# Altium PCB CW308T_ATMegaRF.PcbDoc
Units mil, origin at the board's own origin, x right, y up, seen from the top; angles counter-clockwise.
Board outline 2070 x 2695 mil, 4 copper layers (Component Side, Ground Plane, Power Plane, Solder Side), stack 33.234 mil thick; 31 components, 49 nets, 221 pads, 77 vias.
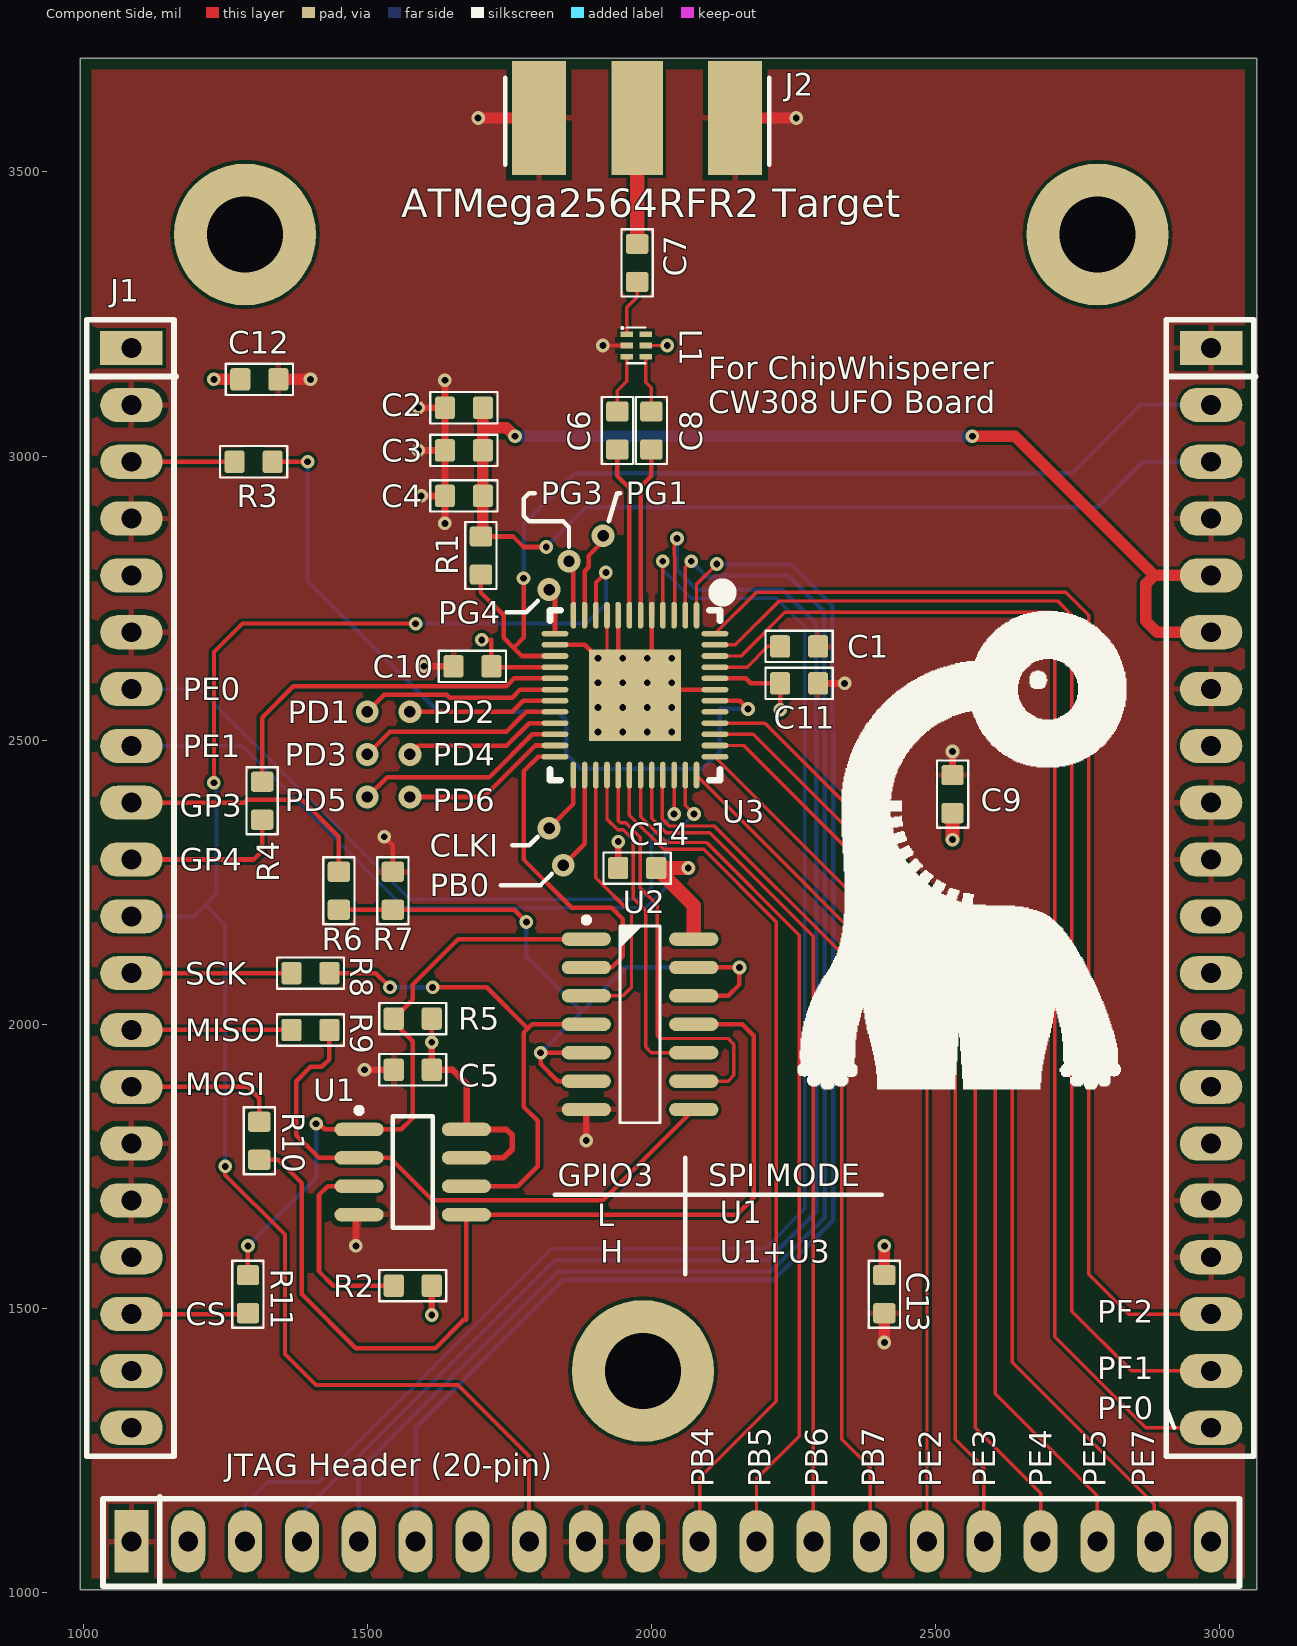
[diagram p0: Component Side view]
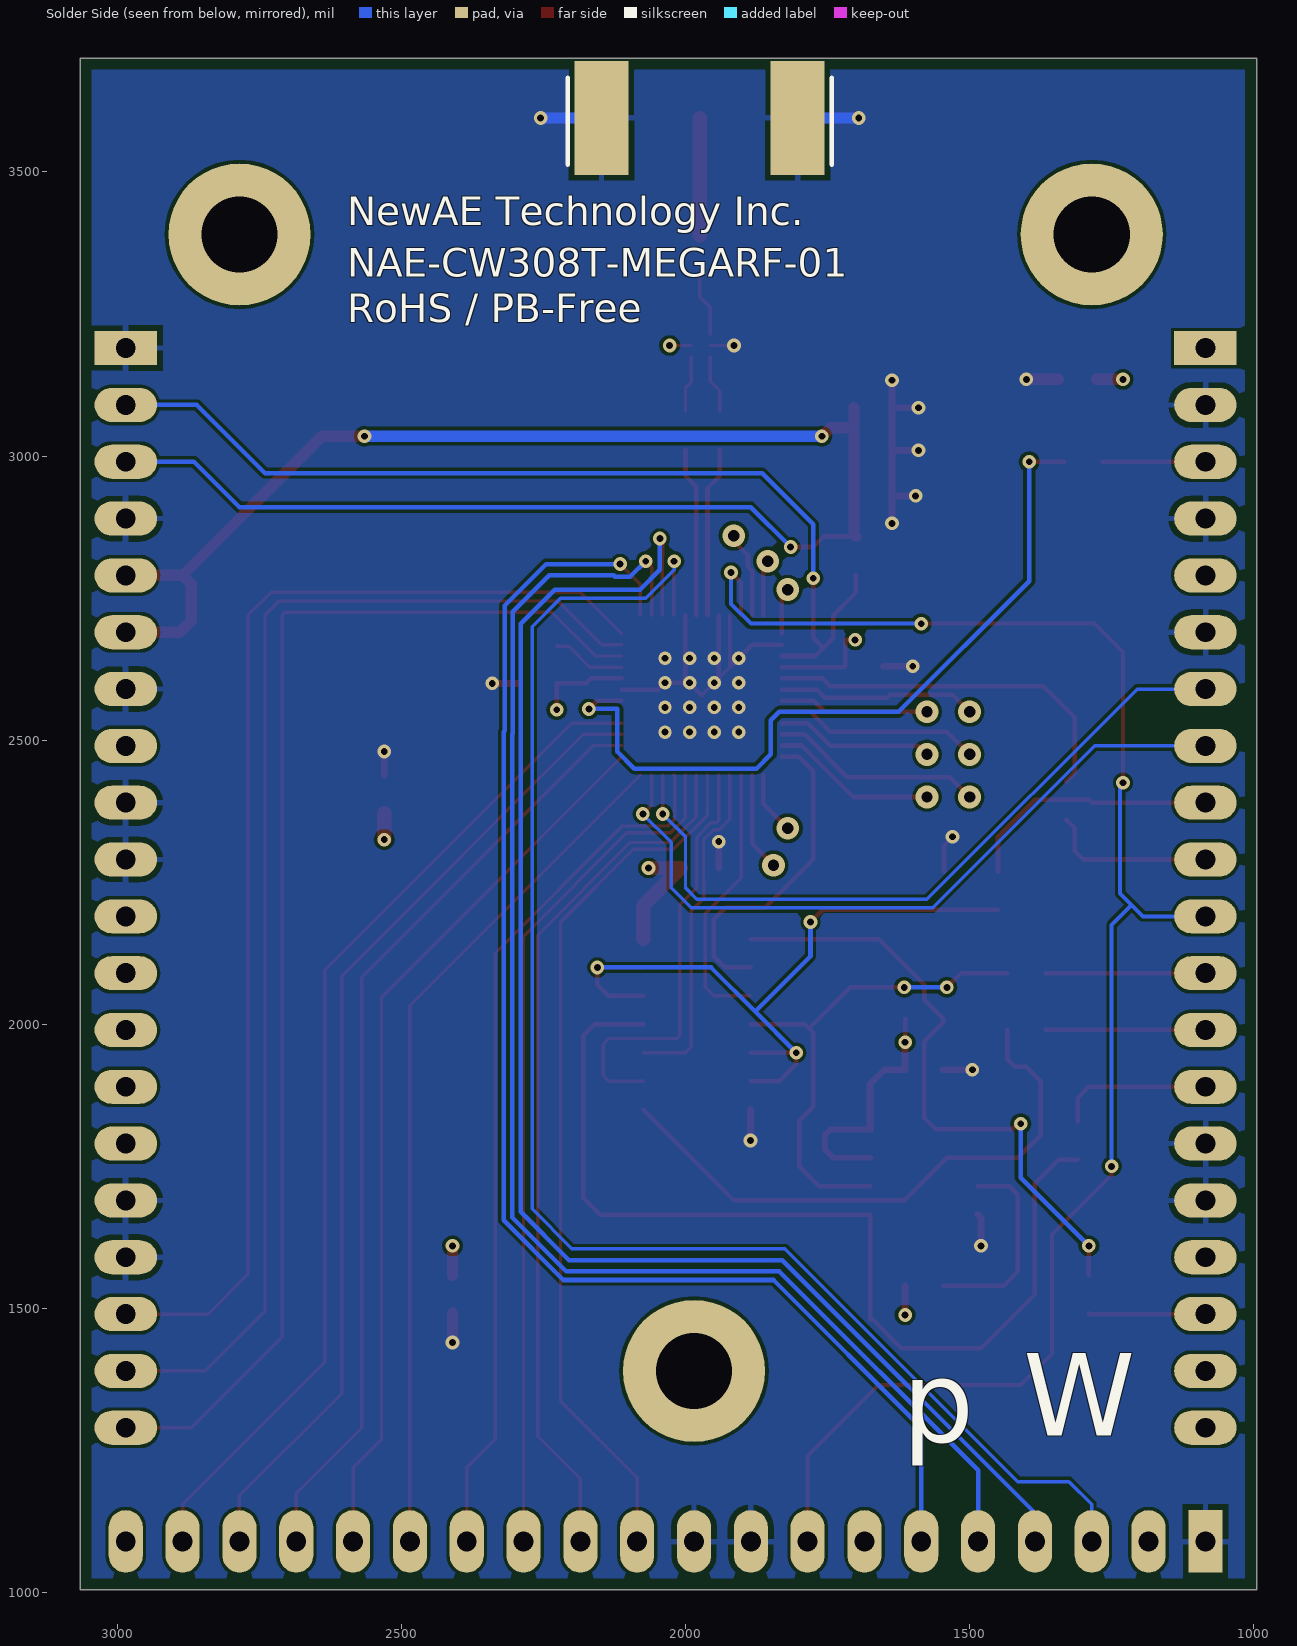
[diagram p1: Solder Side view, seen from below]
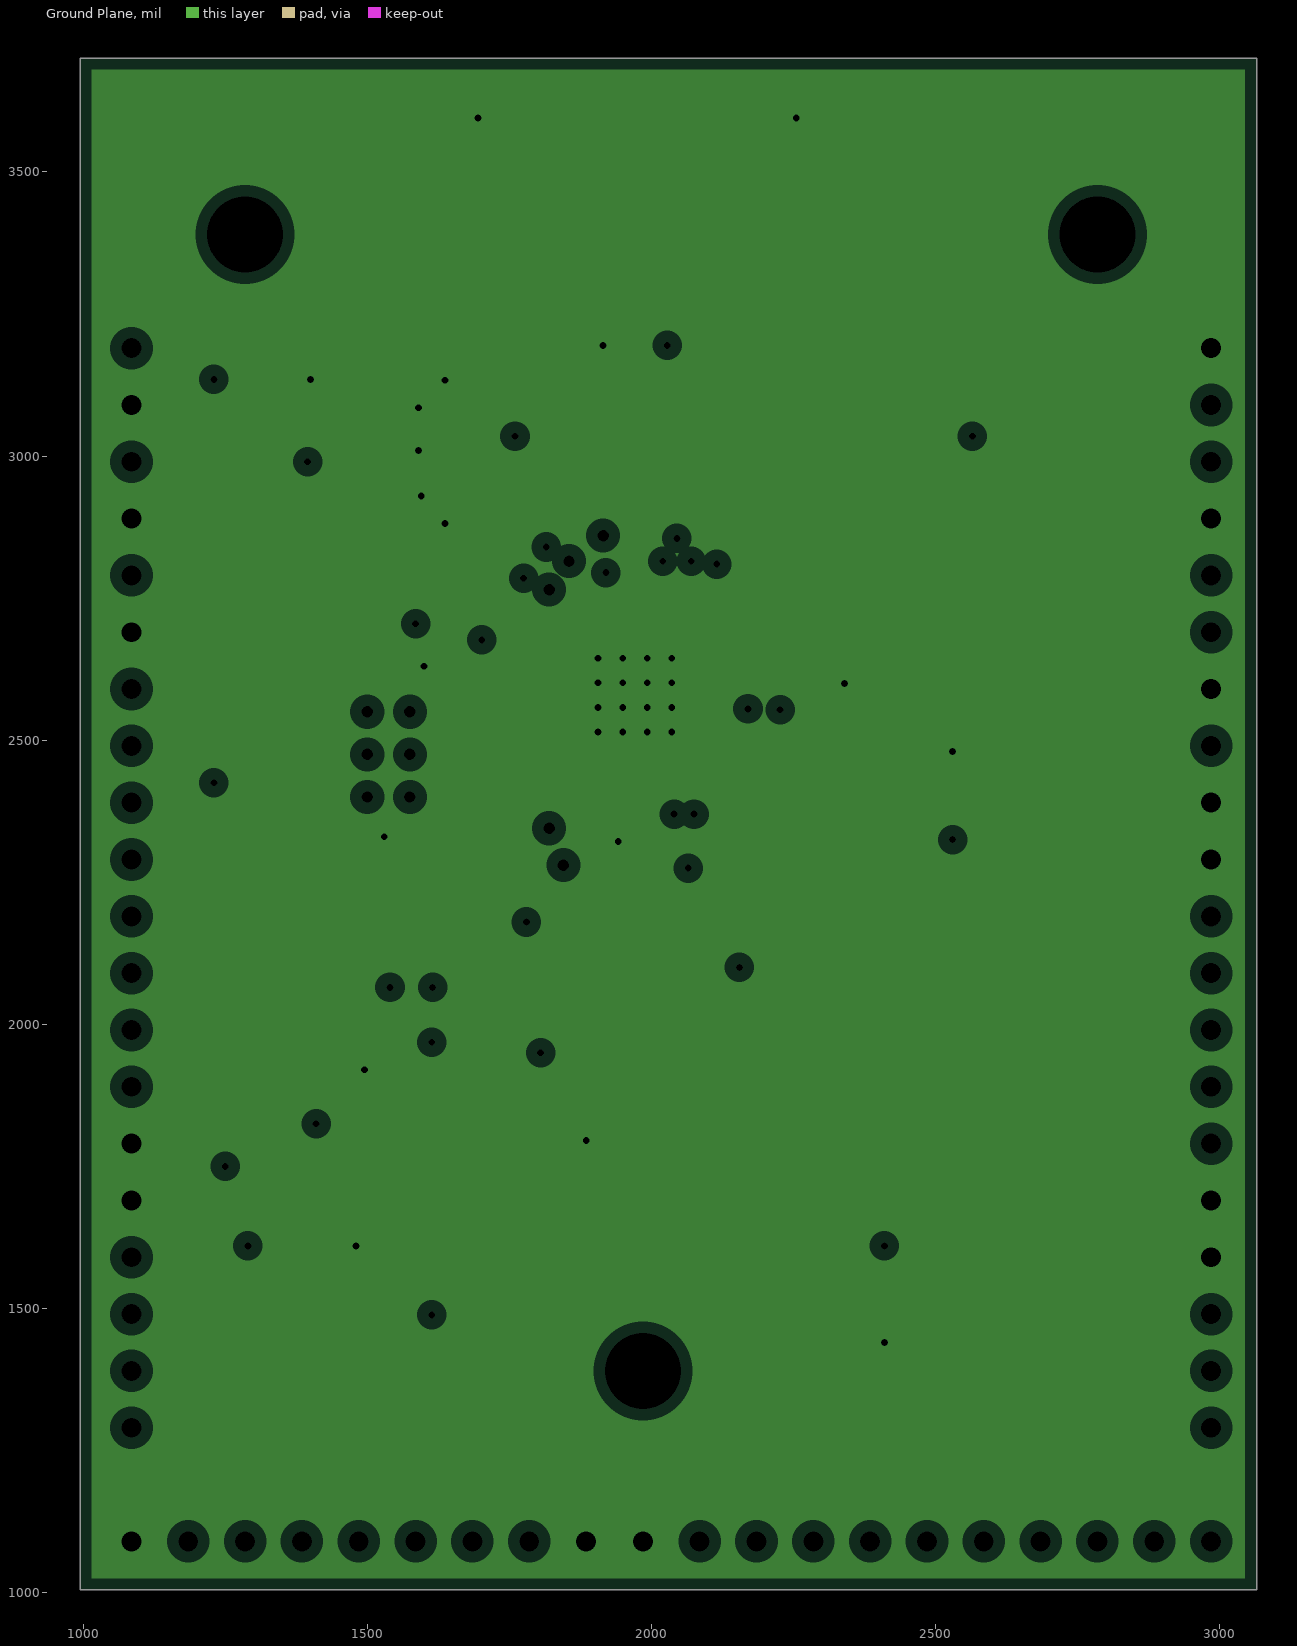
[diagram p2: Ground Plane, clearances drawn from the general rule]
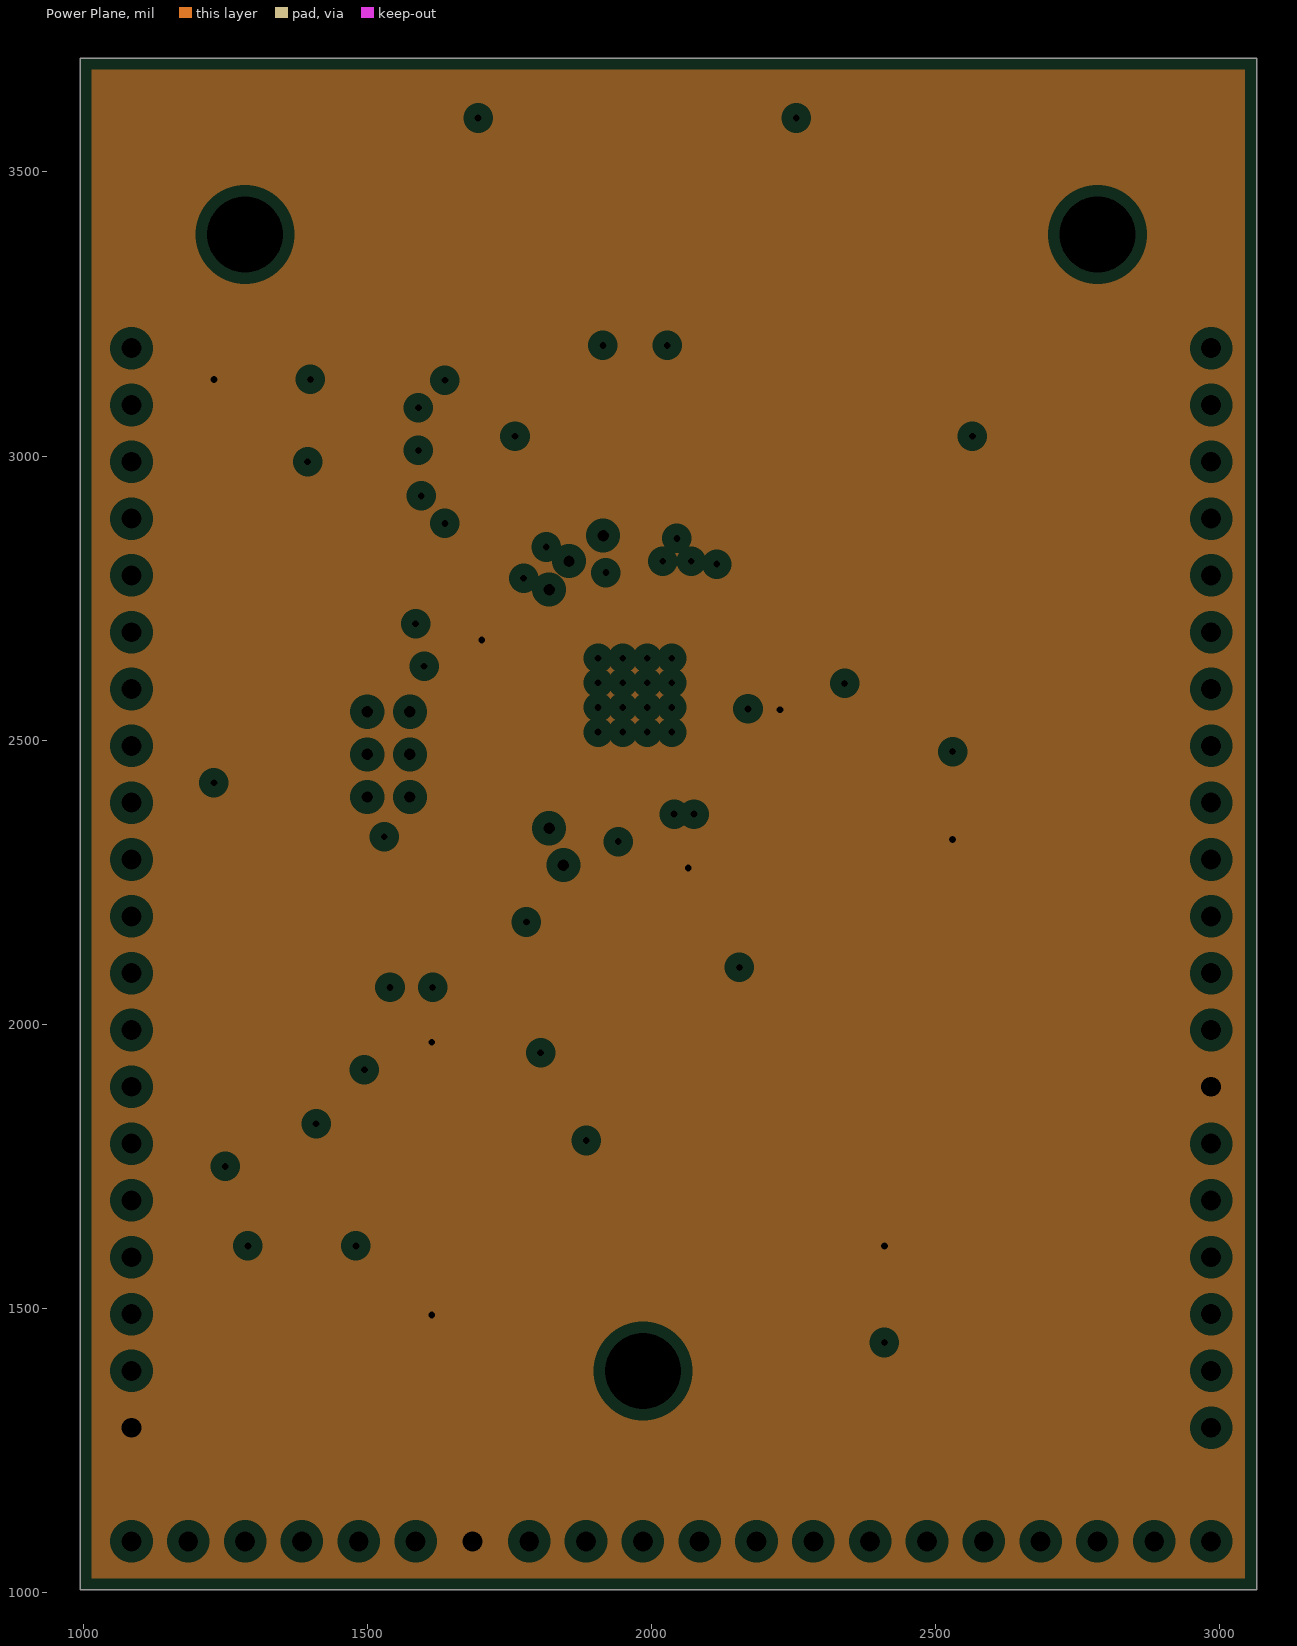
[diagram p3: Power Plane, clearances drawn from the general rule]

## Layer stack, top to bottom
Top Solder: solder mask 0.4, Solder Resist, Dk 3.5
Component Side: signal copper 1.4
Dielectric 1: core 12.6, FR-4, Dk 4.8
Ground Plane: plane copper 1.417, net GND
Dielectric 3: prepreg 5, Dk 4.2
Power Plane: plane copper 1.417, net VCC
Dielectric 4: core 10, Dk 4.2
Solder Side: signal copper 1.4
Bottom Solder: solder mask 0.4, Solder Resist, Dk 3.5

## Board outline
995,1005 3065,1005 3065,3700 995,3700

## Design rules (kind name [scope] priority, off if disabled: settings)
BoardOutlineClearance [All] p1: gap=20 except(0: Arc-SplitContinuation Track-SplitContinuation SMDPad-SplitContinuation THPad-SplitContinuation Via-SplitContinuation Fill-SplitContinuation Poly-SplitContinuation Region-SplitContinuation Text-SplitContinuation)
Clearance [All] p1: gap=6
HoleSize [All] p1: absolutevalues=TRUE maxlimit=150 minlimit=11.81 maxpercent=80.000 minpercent=20.000
PlaneClearance [All] p1: clearance=20
PlaneConnect PlaneConnect_VIA [isVia] p1: planeconnectstyle=Direct reliefexpansion=20 reliefentries=4 reliefconductorwidth=10 reliefairgap=10
PlaneConnect [All] p2: planeconnectstyle=Relief reliefexpansion=20 reliefentries=4 reliefconductorwidth=10 reliefairgap=10
PolygonConnect PolygonConnect_1 [All vs isVia] p1: connectstyle=Direct reliefconductorwidth=10 reliefentries=4 polygonreliefangle="90 Angle" airgapwidth=10
PolygonConnect [All] p2: connectstyle=Relief reliefconductorwidth=10 reliefentries=4 polygonreliefangle="90 Angle" airgapwidth=10
RoutingVias [All] p1: holewidth=12 width=24 viastyle="Through Hole" minholewidth=10 minwidth=20 maxholewidth=150 maxwidth=200
SilkToSilkClearance [All] p1: silktosilkclearance=1
SilkToSolderMaskClearance [IsPad] p1: minsilkscreentomaskgap=2 clearancetoexposedcopper=TRUE
SolderMaskExpansion [All] p1: expansion=4
Width [All] p1: maxlimit=50 minlimit=6 preferedwidth=6 minimp=50.000000 maximp=50.000000 favimp=50.000000
25 further rules are at their usual default settings.

## Components (designator, comment, footprint, x,y, rotation, side; value= is the part's Value field where it differs from the comment)
C1 "approved sub OK" CAPC1608X90N 2260,2665 r0 top
C2 "approved sub OK" CAPC1608X90N 1670,3085 r180 top
C3 "approved sub OK" CAPC1608X90N 1670,3010 r180 top
C4 "approved sub OK" CAPC1608X90N 1670,2930 r180 top
C5 "approved sub OK" CAPC1608X90N 1580,1920 r180 top
C6 "18p" CAPC1608X90N 1940,3045 r90 top
C7 "18p" CAPC1608X90N 1975,3340 r90 top
C8 "18p" CAPC1608X90N 2000,3045 r90 top
C9 "approved sub OK" CAPC1608X90N 2530,2405 r90 top
C10 "approved sub OK" CAPC1608X90N 1685,2630 r180 top
C11 "approved sub OK" CAPC1608X90N 2260,2600 r0 top
C12 "approved sub OK" CAPC1608X90N 1310,3135 r0 top
C13 "approved sub OK" CAPC1608X90N 2410,1525 r270 top
C14 "approved sub OK" CAPC1608X90N 1975,2275 r180 top
J1 "CW308_TARGETCON" CW308_TBOARD_CONN 1085,3190 r0 top locked
J2 "SMA-M" CON-SMAM-PCB-EDGE062 1975,3595 r90 top
L1 "2400–2500 MHz" WE-BAL_0603 1973.27,3194.69 r270 top
R1 "Thick Film" RESC1608X55N 1700,2825 r270 top
R2 "Thick Film" RESC1608X55N 1580,1540 r180 top
R3 "Thick Film" RESC1608X55N 1300,2990 r0 top
R4 "Thick Film" RESC1608X55N 1315,2393.46 r270 top
R5 "Thick Film" RESC1608X55N 1580,2010 r180 top
R6 "Thick Film" RESC1608X55N 1450,2235 r90 top
R7 "Thick Film" RESC1608X55N 1545,2235 r270 top
R8 "Thick Film" RESC1608X55N 1400,2090 r0 top
R9 "Thick Film" RESC1608X55N 1400,1990 r0 top
R10 "Thick Film" RESC1608X55N 1310,1795 r270 top
R11 "Thick Film" RESC1608X55N 1290,1525 r90 top
U1 "SST25VF040B-50-4C-SAF-T" MCHP-SOIC-SA8_N 1580,1740 r0 top
U2 "MC14066BDG" SOIC127P600X175-14AN 1980,2000 r0 top
U3 "ATMEGA2564RFR2-ZU" QFN50P700X700X100_HS-49M 1971.1,2579.25 r270 top

## Footprints (in the part's own frame and the unit in brackets; to place one, negate y for a bottom-side part, rotate by r counter-clockwise, add the part's x,y. Pads: shape width x height; smd on the part's side, far side on the other; paste and mask are expansions set on the pad)
CAPC1608X90N [mm] "Chip Capacitor, Body 1.6x0.8mm, EIA 0603, IPC Medium Density"
  round 0.254 on Mech15: 0(0,0)
  rrect25% 0.9x1 smd: 1(-0.85,0) 2(0.85,0)
  Component Side pour cut-out: -0.6,0.5 -0.4,0.7 0.4,0.7 0.6,0.5 0.6,-0.5 0.4,-0.7 -0.4,-0.7 -0.6,-0.5
  silkscreen extent -1.5,-0.7 1.5,0.7, body extent -0.85,-0.45 0.85,0.45, height 0.89
CON-SMAM-PCB-EDGE062 [mm] "Connector, SMA Edge Mount for 0.062\" Thick Board, 5-Lead"
  rect 5.08x2.29 smd: 1(0,0)
  rect 5.08x2.415 smd: 2(0,-4.383) 5(0,4.383)
  rect 5.08x2.415 smd far side: 3(0,-4.383) 4(0,4.383)
  silkscreen extent -2.1,-5.9 1.8,5.9, body extent -2.15,-4.8 15.3,4.72, height 4.34
CW308_TBOARD_CONN [mil]
  rect 110x60 hole 35: A1(0,0) C1(1900,0)
  oval 110x60 hole 35: A2(0,-100) A3(0,-200) A4(0,-300) A5(0,-400) A6(0,-500) A7(0,-600) A8(0,-700) A9(0,-800) A10(0,-900) A11(0,-1000) A12(0,-1100) A13(0,-1200) A14(0,-1300) A15(0,-1400) A16(0,-1500) A17(0,-1600) A18(0,-1700) A19(0,-1800) A20(0,-1900) C2(1900,-100) C3(1900,-200) C4(1900,-300) C5(1900,-400) C6(1900,-500) C7(1900,-600) C8(1900,-700) C9(1900,-800) C10(1900,-900) C11(1900,-1000) C12(1900,-1100) C13(1900,-1200) C14(1900,-1300) C15(1900,-1400) C16(1900,-1500) C17(1900,-1600) C18(1900,-1700) C19(1900,-1800) C20(1900,-1900)
  rect 60x110 hole 35: B1(0,-2100)
  oval 60x110 hole 35: B2(100,-2100) B3(200,-2100) B4(300,-2100) B5(400,-2100) B6(500,-2100) B7(600,-2100) B8(700,-2100) B9(800,-2100) B10(900,-2100) B11(1000,-2100) B12(1100,-2100) B13(1200,-2100) B14(1300,-2100) B15(1400,-2100) B16(1500,-2100) B17(1600,-2100) B18(1700,-2100) B19(1800,-2100) B20(1900,-2100)
  round 250 hole 134: MH1(200,200) MH2(900,-1800) MH2(1700,200)
  silkscreen extent -79,-2179 1979,50, body extent -50,-2149 1950,50, height 48
MCHP-SOIC-SA8_N [mm] "SOIC, 8-Leads, Body 4.9x3.9mm, Pitch 1.27mm, IPC Medium Density"
  oval 2.2x0.6 smd: 1(-2.4,1.905) 2(-2.4,0.635) 3(-2.4,-0.635) 4(-2.4,-1.905) 5(2.4,-1.905) 6(2.4,-0.635) 7(2.4,0.635) 8(2.4,1.905)
  silkscreen extent -2.52,-2.5 0.9,2.88, body extent -2,-2.5 2,2.5, height 1.75
QFN50P700X700X100_HS-49M [mm] "QFN, 48-Leads, Body 7.00x7.00mm, Pitch 0.50mm, Thermal Pad 4.10x4.10mm, IPC Low Density"
  oval 1.2x0.25 smd: 1(-3.575,2.75) 2(-3.575,2.25) 3(-3.575,1.75) 4(-3.575,1.25) 5(-3.575,0.75) 6(-3.575,0.25) 7(-3.575,-0.25) 8(-3.575,-0.75) 9(-3.575,-1.25) 10(-3.575,-1.75) 11(-3.575,-2.25) 12(-3.575,-2.75) 25(3.575,-2.75) 26(3.575,-2.25) 27(3.575,-1.75) 28(3.575,-1.25) 29(3.575,-0.75) 30(3.575,-0.25) 31(3.575,0.25) 32(3.575,0.75) 33(3.575,1.25) 34(3.575,1.75) 35(3.575,2.25) 36(3.575,2.75)
  oval 0.25x1.2 smd: 13(-2.75,-3.575) 14(-2.25,-3.575) 15(-1.75,-3.575) 16(-1.25,-3.575) 17(-0.75,-3.575) 18(-0.25,-3.575) 19(0.25,-3.575) 20(0.75,-3.575) 21(1.25,-3.575) 22(1.75,-3.575) 23(2.25,-3.575) 24(2.75,-3.575) 37(2.75,3.575) 38(2.25,3.575) 39(1.75,3.575) 40(1.25,3.575) 41(0.75,3.575) 42(0.25,3.575) 43(-0.25,3.575) 44(-0.75,3.575) 45(-1.25,3.575) 46(-1.75,3.575) 47(-2.25,3.575) 48(-2.75,3.575)
  rect 4.1x4.1 smd: 49(0,0)
  silkscreen extent -4.57,-3.8 3.8,3.8, body extent -3.58,-3.58 3.58,3.58, height 1
RESC1608X55N [mm] "Chip Resistor, Body 1.6x0.8mm, EIA 0603, IPC Medium Density"
  round 0.254 on Mech15: 0(0,0)
  rrect25% 0.9x1 smd: 1(-0.85,0) 2(0.85,0)
  Component Side pour cut-out: -0.6,0.5 -0.4,0.7 0.4,0.7 0.6,0.5 0.6,-0.5 0.4,-0.7 -0.4,-0.7 -0.6,-0.5
  silkscreen extent -1.5,-0.7 1.5,0.7, body extent -0.87,-0.47 0.88,0.48, height 0.54
SOIC127P600X175-14AN [mm] "SOIC, 1.27mm pitch, 14 pin, Body 8.65x3.90mm"
  round 1 on Mech15: 0(0,0)
  oval 2.2x0.6 smd: 1(-2.4,3.81) 2(-2.4,2.54) 3(-2.4,1.27) 4(-2.4,0) 5(-2.4,-1.27) 6(-2.4,-2.54) 7(-2.4,-3.81) 8(2.4,-3.81) 9(2.4,-2.54) 10(2.4,-1.27) 11(2.4,0) 12(2.4,1.27) 13(2.4,2.54) 14(2.4,3.81)
  silkscreen extent -2.52,-4.4 0.9,4.78, body extent -3.01,-4.32 3.01,4.33, height 1.75
WE-BAL_0603 [mm]
  rect 0.25x0.55 smd: 1(-0.5,-0.425) 2(0,-0.425) 3(0.5,-0.425) 4(0.5,0.425) 5(0,0.425) 6(-0.5,0.425)
  silkscreen extent -0.82,-0.66 0.8,0.4, body extent -0.8,-0.4 0.8,0.4, height 0.61

## Part data
C1 C4 C9: library part CAPC_1u_0603_X7R_16V_10%, "Capacitor SMD Cer 1uF 10% 16V X7R 0603"
C2 C3 C5 C10 C11 C12 C13 C14: library part CAPC_100n_0603_X7R_50V_10%, "Capacitor SMD Cer 100nF 10% 50V X7R 0603"
C6 C7 C8: library part CAPC_18p_0603_100V, "Capacitor SMD Cer 18pF 2% 100V NP0 0603"
J1: library part CW308_TBOARD, "CW308 \"Standard\" Target Board Connector"
J2: library part CON-SMA-PCBEDGE-003.062, "SMA Female Edge Mount Connector for 0.062\" Thick Board"
L1: library part "WE-BAL 0603, 748411245", "WE-BAL Multilayer Chip Balun, Frequence=2400–2500 MHz"
R1 R2 R3 R4 R6 R8 R9 R10 R11: library part RES_51R_0603_1%, "Resistor SMD chip 51 Ohm 0.1W 1% 0603"
R5 R7: library part RES_3K3_0603_5%, "Resistor SMD chip 3.3k Ohm 0.1W 5% 0603"
U1: library part CMP-0378-00095-1, "4 Mbit SPI Serial Flash, 2.7 to 3.6 V, 50 MHz, 0 to 70 degC, 8-pin SOIC (SA8), Tape and Reel"
U2: library part CMP-1307-00073-1, "Quad Analog Switch / Quad Multiplexer, 3 to 18 V, -55 to 125 degC, 14-Pin SOIC, Pb-Free, Tube"
U3: library part ATMEGA2565RFR2-ZU, "2.4GHZ 256k SOC 48pin Ind 125C MSL3 - 2.4GHZ 802.15.4 256K SOC 48pin Tray/ VQFN (ZB)"

## Via types
v1: diameter 24, hole 12, Component Side to Solder Side, tented both sides, 27 vias
v2: diameter 24, hole 12, Component Side to Solder Side, 23 vias
v3: diameter 23.62, hole 11.81, Component Side to Solder Side, tented both sides, 16 vias
v4: diameter 40, hole 20, Component Side to Solder Side, 11 vias

## Nets (pads, with @x,y where several pads share a name; then routed paths per layer and width w, separated by ;. In a path a pad name is that pad's centre, name@x,y a point inside that pad or via, vN(x,y) a via of type N, cw(c..) or ccw(c..) an arc to the next point about the centre after c; other vN are vias at no path point)
AVR_CS: U2.2 U3.24 | length 577.5
  Component Side w8: U3.24 1800.78,2470.98 1775,2445.2 1775,2290 1860,2205 1930,2205 1950,2185 1950,2120 1930,2100 U2.2
AVR_MISO: U2.9 U3.29 | length 763.6
  Component Side w6: U3.29 1941.57,2358.43 1945.46,2354.54 1955.2,2354.54 1980.25,2329.49 1980.25,2249.21 1980,2248.96 1980,2240 2010,2210 2010,1980 2015,1975 2135,1975 2145,1965 2145,1910 2135,1900 U2.9
AVR_MOSI: U2.10 U3.28 | length 601.3
  Component Side w6: U3.28 1921.89,2361.14 1940.49,2342.54 1950.23,2342.54 1968.25,2324.52 1968.25,2254.18 1968,2253.93 1968,2222 1990,2200 1990,1960 2000,1950 U2.10
AVR_SCK: U2.3 U3.27 | length 485.2
  Component Side w6: U2.3 1950,2050 1965,2065 1965,2195 1902.2,2257.8 U3.27
CLKIN: R3.2 U3.42 | length 1369.9
  Component Side w8: R3.2 v2(1395,2990) ; U3.42 2155.59,2569.41 v2(2170,2555)
  Solder Side w8: v2(1395,2990) 1395,2780 1625,2550 1835,2550 1850,2535 1850,2475 1875,2450 2090,2450 2120,2480 2120,2555 v2(2170,2555)
F_CS: R5.2 R11.2 U1.1 U2.1 | length 1100
  Component Side w8: R11.2 v2(1290,1610) ; v2(1410,1825) 1415,1825 1425,1815 U1.1 1560,1815 1580,1835 1580,1970 1546.54,2003.46 R5.2 1580,2043.46 1580,2070 1660,2150 U2.1
  Solder Side w8: v2(1290,1610) 1410,1730 v2(1410,1825)
F_MISO: R9.2 U1.2 U2.8 | length 1034.3
  Component Side w8: R9.2 1433.46,1938.46 1420,1925 1400,1925 1375,1900 1375,1805 1415,1765 U1.2 1540,1765 1615,1690 1914.49,1690 U2.8
F_MOSI: R10.2 U1.5 U2.11 | length 1738.5
  Component Side w8: R10.2 1343.46,1761.54 1385,1720 1385,1525 1480,1430 1620,1430 1670,1480 1674.49,1480 U1.5 2150,1665 2180,1695 2180,1980 2160,2000 U2.11
F_SCK: R8.2 U1.6 U2.4 | length 891.5
  Component Side w8: R8.2 1515,2090 v2(1540,2065) ; v2(1615,2065) 1710,2065 1782.5,1992.5 ; U1.6 1765,1715 1800,1750 1800,1830 1775,1855 1775,1985 1782.5,1992.5 ; U2.4 1790,2000 1782.5,1992.5
  Solder Side w8: v2(1540,2065) v2(1615,2065)
GND: C1.2 C2.2 C3.2 C4.2 C5.2 C9.2 C10.2 C11.2 C12.2 C13.2 C14.2 J1.A2 J1.A4 J1.A6 J1.A15 J1.A16 J1.B1 J1.B9 J1.B10 J1.C1 J1.C4 J1.C7 J1.C9 J1.C10 J1.C16 J1.C17 J2.2 J2.3 J2.4 J2.5 L1.2 R7.1 U1.4 U2.7 U3.5 U3.8 U3.9 U3.14 U3.43 U3.49 | length 2040.7
  Component Side w6: v1(1914.69,3194.69) L1.2 ; U3.9 1921.89,2628.46 1941.57,2608.78 U3.49
  Component Side w8: v1(1530,2330) 1545,2315 R7.1 ; U3.14 1882.52,2667.83 U3.49@1921.89,2628.46 ; U3.49@1941.57,2608.78 U3.8 ; U3.49 v3(1992.76,2600.91) ; U3.5 2000.63,2608.78 v3(1992.76,2600.91) ; U3.43 2047.87,2589.09 v3(2036.06,2600.91) v3(1992.76,2600.91)
  Component Side w12: v1(1480,1610) 1480,1659.49 U1.4 ; v1(1495,1920) C5.2 ; v1(1590,3010) C3.2 ; v1(1590,3085) C2.2 ; v1(1595,2930) C4.2 ; v1(1600,2630) C10.2 ; v1(1636.54,2881.54) C4.2 ; v1(1636.54,3133.46) C2.2 ; v1(1885.51,1795.51) U2.7 ; C14.2 v1(1941.54,2321.54) ; C11.2 v1(2340,2600) ; C9.2 v1(2530,2480) ; C4.2 C2.2
  Component Side w20: C12.2 v1(1400,3135) ; v1(1695,3595) J2.5 ; J2.2 v1(2255,3595) ; v1(2410,1440) C13.2
  Solder Side w20: v1(1695,3595) J2.4 ; J2.3 v1(2255,3595)
  other v3: 1906.14,2514.29 1949.45,2514.29 1992.76,2514.29 2036.06,2514.29 1906.14,2557.6 1949.45,2557.6 1992.76,2557.6 2036.06,2557.6 1906.14,2600.91 1949.45,2600.91 1906.14,2644.21 1949.45,2644.21 1992.76,2644.21 2036.06,2644.21
GPIO3: J1.A9 R6.2 | length 455.5
  Component Side w8: J1.A9 1283.98,2390 1288.98,2395 1385,2395 1450,2330 R6.2
GPIO4: J1.A10 R4.2 | length 297.4
  Component Side w8: J1.A10 1300,2290 1315,2305 1315,2345 R4.2@1330,2360
HDR1: J1.B11 U3.30 | length 1553
  Component Side w6: U3.30 1961.26,2368.13 2021.39,2308 2092,2308 2220,2180 2220,1336.97 2085,1201.97 J1.B11
HDR2: J1.B12 U3.31 | length 1536.5
  Component Side w6: U3.31 1980.94,2365.42 2026.36,2320 2096.97,2320 2260,2156.97 2260,1275 2185,1200 J1.B12
HDR3: J1.B13 U3.32 | length 1511.2
  Component Side w6: U3.32 2000.63,2362.7 2026.33,2337 2103,2337 2285,2155 J1.B13
HDR4: J1.B14 U3.33 | length 1547.3
  Component Side w6: U3.33 2019,2437.19 2019,2361.3 2031.3,2349 2111,2349 2335,2125 2335,1270 2385,1220 J1.B14
HDR5: J1.B15 U3.36 | length 1516.5
  Component Side w6: U3.36 2485,2032.87 J1.B15
HDR6: J1.B16 U3.37 | length 1577
  Component Side w6: U3.37 2535,2047.83 2535,1270 2585,1220 J1.B16
HDR7: J1.B17 U3.38 | length 1667.7
  Component Side w6: U3.38 2162.36,2490.67 2570,2083.03 2570,1290 2685,1175 J1.B17
HDR8: J1.B18 U3.39 | length 1738.9
  Component Side w6: U3.39 2179.65,2510.35 2605,2085 2605,1350 2785,1170 J1.B18
HDR9: J1.B19 U3.40 | length 1811.9
  Component Side w6: U3.40 2199.96,2530.04 2635,2095 2635,1405 2885,1155 J1.B19
LED1: J1.C18 U3.48 | length 2109.3
  Component Side w6: U3.48 2185,2760.67 2729.33,2760.67 2770,2720 2770,1560 2840,1490 J1.C18
LED2: J1.C19 U3.47 | length 2184
  Component Side w6: U3.47 2147.83,2667.83 2225,2745 2715,2745 2740,2720 2740,1495 2845,1390 J1.C19
LED3: J1.C20 U3.46 | length 2243.3
  Component Side w6: U3.46 2158.15,2648.15 2235,2725 2705,2725 2710,2720 2710,1450 2870,1290 J1.C20
NetC1_1: C1.1 U3.45 | length 129.8
  Component Side w6: U3.45 2168.46,2628.46 2205,2665 C1.1
NetC6_1: C6.1 U3.7 | length 300.3
  Component Side w8: C6.1 1940,2965 1961.26,2943.74 U3.7
NetC6_2: C6.2 L1.3 | length 103.4
  Component Side w6: C6.2 1940,3115 1956.54,3131.54 L1.3
NetC7_1: C7.1 L1.1 | length 114.8
  Component Side w6: L1.1 1956.54,3261.54 1975,3280 C7.1@1975,3321.54
NetC7_2: C7.2 J2.1 | length 206.5
  Component Side w25: C7.2@1975,3388.46 J2.1
NetC8_1: C8.1 U3.6 | length 299.4
  Component Side w8: U3.6 1980.94,2945.94 2000,2965 C8.1
NetC8_2: C8.2 L1.4 | length 100.7
  Component Side w6: L1.4 1990,3130 2000,3120 C8.2
NetJ1_A3: J1.A3 R3.1 | length 181.5
  Component Side w8: J1.A3 R3.1
NetJ1_A12: J1.A12 R8.1 | length 281.5
  Component Side w8: J1.A12 R8.1
NetJ1_A13: J1.A13 R9.1 | length 281.5
  Component Side w8: J1.A13 R9.1
NetJ1_A14: J1.A14 R10.1 | length 274.8
  Component Side w8: J1.A14 1290,1890 1310,1870 R10.1
NetJ1_A18: J1.A18 R11.1 | length 205.6
  Component Side w8: J1.A18 1288.46,1490 R11.1
NetR2_2: R2.2 U1.3 | length 353.5
  Component Side w8: U1.3 1430.26,1715 1415,1699.74 1415,1565 1440,1540 R2.2
NetR4_1: R4.1 U3.17 | length 663.1
  Component Side w8: R4.1@1330,2426.93 1315,2441.93 1315,2540 1370,2595 1745,2595 1758.78,2608.78 U3.17
NetR6_1: R6.1 R7.2 U2.5 U2.6 U2.12 U2.13 | length 1341.7
  Component Side w8: R6.1 1758.46,2201.54 v2(1780,2180) ; U2.6 1835,1900 1805,1930 v2(1805,1950) U2.5 ; U2.12 2135,2050 2155,2070 v2(2155,2100) U2.13
  Solder Side w8: v2(1780,2180) 1780,2120 1877.5,2022.5 ; v2(1805,1950) 1877.5,2022.5 ; v2(2155,2100) 1955,2100 1877.5,2022.5
NRST: J1.A11 J1.B8 U3.10 | length 2968.8
  Component Side w7: v2(1230,2425) 1230,2655 1280,2705 v2(1585,2705) ; v2(1250,1750) 1250,1735 1355,1630 1355,1420 1410,1365 1660,1365 1785,1240 J1.B8 ; U3.10 1902.2,2777.2 v2(1920,2795)
  Solder Side w7: J1.A11 1195,2190 1215,2210 ; v2(1230,2425) 1235,2430 1235,2230 1215,2210 ; v2(1250,1750) 1250,2175 1215,2210 ; v2(1585,2705) 1885,2705 1920,2740 v2(1920,2795)
RX: J1.A8 U3.35 | length 1298.1
  Component Side w6: U3.35 2059.68,2385.32 v2(2075,2370)
  Solder Side w6: J1.A8 1280,2490 1565,2205 1990,2205 2025,2240 2025,2320 v2(2075,2370)
SHUNTH: C2.1 C3.1 C4.1 J1.C3 J1.C5 J1.C6 R1.1 | length 3181.5
  Component Side w8: R1.1 1756.54,2858.46 1775,2840 v2(1815,2840)
  Component Side w20: R1.1 1703.46,2861.93 1703.46,3050 ; C2.1 1703.46,3050 ; v2(1760,3035) 1745,3050 1703.46,3050 ; v2(2565,3035) 2640,3035 2885,2790 ; J1.C6 2890,2690 2870,2710 2870,2775 2885,2790 ; J1.C5 2885,2790
  Solder Side w8: v2(1815,2840) 1885,2910 2785,2910 2865,2990 J1.C3
  Solder Side w20: v2(1760,3035) v2(2565,3035)
SHUNTL: J1.C2 R1.2 U3.15 | length 1754.3
  Component Side w8: R1.2 1700,2760 1740,2720 1740,2680 1755.93,2664.07 ; v2(1775,2785) 1775,2680 1759.07,2664.07 1755.93,2664.07 ; U3.15 1771.85,2648.15 1755.93,2664.07
  Solder Side w8: v2(1775,2785) 1775,2880 1865,2970 2740,2970 2860,3090 J1.C2
TCK: J1.B6 U3.1 | length 2507
  Component Side w6: U3.1 2079.37,2774.37 v2(2115,2810)
  Solder Side w8: J1.B6 1585,1290 1845,1550 2215,1550 2320,1655 2320,2514.8 2318,2516.8 2318,2737 2245,2810 v2(2115,2810)
TDI: J1.B3 U3.4 | length 2691.9
  Component Side w6: v2(2020,2815) 2020.32,2814.68 U3.4
  Solder Side w6: J1.B3 1285,1155 1325,1195 1415,1195 1825,1605 2200,1605 2270,1675 2270,2700 2220,2750 2070,2750 2020,2800 v2(2020,2815)
TDO: J1.B4 U3.3 | length 2686.8
  Component Side w6: U3.3 2041,2721 2041,2823.7 2040,2824.7 2040,2850 v2(2045,2855)
  Solder Side w8: J1.B4 1385,1140 1830,1585 2205,1585 2290,1670 2290,2705 2230,2765 2080,2765 2045,2800 v2(2045,2855)
TMS: J1.B5 U3.2 | length 2567.5
  Component Side w6: U3.2 2059.68,2804.68 v2(2070,2815)
  Solder Side w8: J1.B5 1485,1215 1835,1565 2210,1565 2305,1660 2305,2510 2304,2511 2304,2726 2240,2790 2126.11,2790 2124.11,2788 2097,2788 v2(2070,2815)
TX: J1.A7 U3.34 | length 1291.6
  Component Side w6: v2(2040,2370) U3.34
  Solder Side w6: J1.A7 1205,2590 1575,2220 1980,2220 2000,2240 2000,2330 v2(2040,2370)
VCC: C5.1 C9.1 C10.1 C11.1 C12.1 C13.1 C14.1 J1.A20 J1.B7 J1.C14 R2.1 R5.1 U1.7 U1.8 U2.14 U3.16 U3.44 | length 1184.4
  Component Side w8: v1(1613.46,1968.46) R5.1 ; v1(1701.54,2676.54) 1718.46,2676.54 C10.1 1720,2628.46 U3.16 ; U3.44 2166.22,2608.78 2175,2600 C11.1 v1(2226.54,2553.46)
  Component Side w10: U1.7 1740,1765 1755,1780 1755,1805 1745,1815 U1.8
  Component Side w12: v1(1613.46,1488.46) R2.1 ; v1(1613.46,1968.46) C5.1 1650,1920 1675,1895 1675,1815.51 U1.8
  Component Side w20: v1(1230,3135) C12.1 ; C13.1 v1(2410,1610)
  Component Side w25: v1(2065,2275) C14.1 2074.49,2208.98 U2.14 ; v1(2530,2325) C9.1
pads on no net: C1.0 C2.0 C3.0 C4.0 C5.0 C6.0 C7.0 C8.0 C9.0 C10.0 C11.0 C12.0 C13.0 C14.0 J1.A1 J1.A5 J1.A17 J1.A19 J1.B2 J1.B20 J1.C8 J1.C11 J1.C12 J1.C13 J1.C15 J1.MH1 J1.MH2 L1.5 L1.6 R1.0 R2.0 R3.0 R4.0 R5.0 R6.0 R7.0 R8.0 R9.0 R10.0 R11.0 U2.0 U3.11 U3.12 U3.13 U3.18 U3.19 U3.20 U3.21 U3.22 U3.23 U3.25 U3.26 U3.41
copper on no net: | length 2579.4
  Component Side w6: 1990,3194.69 v1(2027.95,3194.69)
  Component Side w8: v4(1500,2400) 1535,2435 1715,2435 1790.35,2510.35 1830.35,2510.35 ; v4@1505,2480 1540,2515 1745,2515 1765,2535 1779.72,2549.72 1830.35,2549.72 ; v4@1511.31,2561.31 v4(1500,2550) 1530,2580 1640,2580 1645,2575 1755,2575 1769.09,2589.09 1830.35,2589.09 ; v4(1575,2475) 1590,2490 1745,2490 1785,2530 1795,2530 1795.04,2530.04 1830.35,2530.04 ; v4(1575,2550) 1755,2550 1774.41,2569.41 1830.35,2569.41 ; v4@1585,2400 1605,2400 1705,2400 1795.67,2490.67 1830.35,2490.67 ; v4(1820,2345) 1862.83,2387.83 1862.83,2438.5 ; v4(1820,2765) 1830.35,2754.65 1830.35,2687.52 ; v4(1845,2280) 1882.52,2317.52 1882.52,2438.5 ; v4(1855,2815) 1850,2810 1862.83,2797.17 1862.83,2720 ; 1882.52,2720 1882.52,2797.52 1890,2805 1890,2825 v4@1920,2855
  other v4: 1575,2400 1500,2475 1915,2860

## Polygon pours and split planes (outlines as drawn)
GND on Solder Side "GND_BOT" (solid, pour order 0): 893.7,3779.53 3078.74,3779.53 3192.91,3665.35 3181.1,3653.54 3181.1,972.44 3062.99,972.44 3003.94,913.39 2972.44,944.88 921.26,944.88 921.26,1023.62 874.02,1070.87
GND on Component Side "GND_TOP" (solid, pour order 2): 988.19,838.58 1043.31,893.7 3137.8,893.7 3137.8,3779.53 3118.11,3799.21 3059.06,3858.27 846.46,3858.27
GND on Ground Plane (split plane): 3044.9,1025.1 1015.1,1025.1 1015.1,3679.9 3044.9,3679.9
VCC on Power Plane (split plane): 3044.9,1025.1 1015.1,1025.1 1015.1,3679.9 3044.9,3679.9

## Silkscreen, mask and mechanical layers (free items; w line width, h text height)
Top Overlay:
  drawing of 22 lines, arcs and shapes, not listed
  text "ATMega2564RFR2 Target" at 1560,3420 h50
  text "For ChipWhisperer / CW308 UFO Board" at 2100,3075 h40
  text "PG3" at 1805,2915 h40
  text "PG1" at 1955,2915 h40
  text "PG4" at 1625,2705 h40
  text "PE0" at 1175,2570 h40
  text "PD1" at 1360,2530 h40
  text "PD2" at 1615,2530 h40
  text "PE1" at 1175,2470 h40
  text "PD3" at 1355,2455 h40
  text "PD4" at 1615,2455 h40
  text "PD5" at 1355,2375 h40
  text "PD6" at 1615,2375 h40
  text "GP3" at 1170,2365 h40
  text "CLKI" at 1610,2295 h40
  text "GP4" at 1170,2270 h40
  text "PB0" at 1610,2225 h40
  text "SCK" at 1180,2070 h40
  text "MISO" at 1180,1970 h40
  text "MOSI" at 1180,1875 h40
  text "GPIO3" at 1835,1715 h40
  text "SPI MODE" at 2100,1715 h40
  text "U1" at 2120,1650 h40
  text "L" at 1905,1645 h40
  text "H" at 1910,1580 h40
  text "U1+U3" at 2120,1580 h40
  text "PF2" at 2785,1475 h40
  text "CS" at 1180,1470 h40
  text "PF1" at 2785,1375 h40
  text "PF0" at 2785,1305 h40
  text "JTAG Header (20-pin)" at 1250,1205 h40
  text "PB4" at 2110,1185 h40 r90
  text "PB5" at 2210,1185 h40 r90
  text "PB6" at 2310,1185 h40 r90
  text "PB7" at 2410,1185 h40 r90
  text "PE2" at 2510,1185 h40 r90
  text "PE3" at 2605,1185 h40 r90
  text "PE4" at 2705,1185 h40 r90
  text "PE5" at 2800,1185 h40 r90
  text "PE7" at 2885,1185 h40 r90
Bottom Overlay:
  text "NewAE Technology Inc." at 2595.43,3405.91 h50
  text "NAE-CW308T-MEGARF-01" at 2595.43,3315.91 h50
  text "RoHS / PB-Free" at 2595.43,3235.91 h50
  text "W" at 1405.51,1228.35 h250
  text "p" at 1618.11,1216.54 h250
M03 - PCB Outline:
  lines w10: 995,4060 1005,4060 ; 995,1005 995,3625 995,3700 1365,3700 3065,3700 3065,3625 3065,1005 995,1005